# Altium PCB air-quality-monitoring-system_pcb.PcbDoc
Units mil, origin at the board's own origin, x right, y up, seen from the top; angles counter-clockwise.
Board outline 6000 x 4000 mil, 2 copper layers (Top Layer, Bottom Layer); 36 components, 30 nets, 143 pads, 19 vias.
Unrouted connection lines stored in the file: 89.
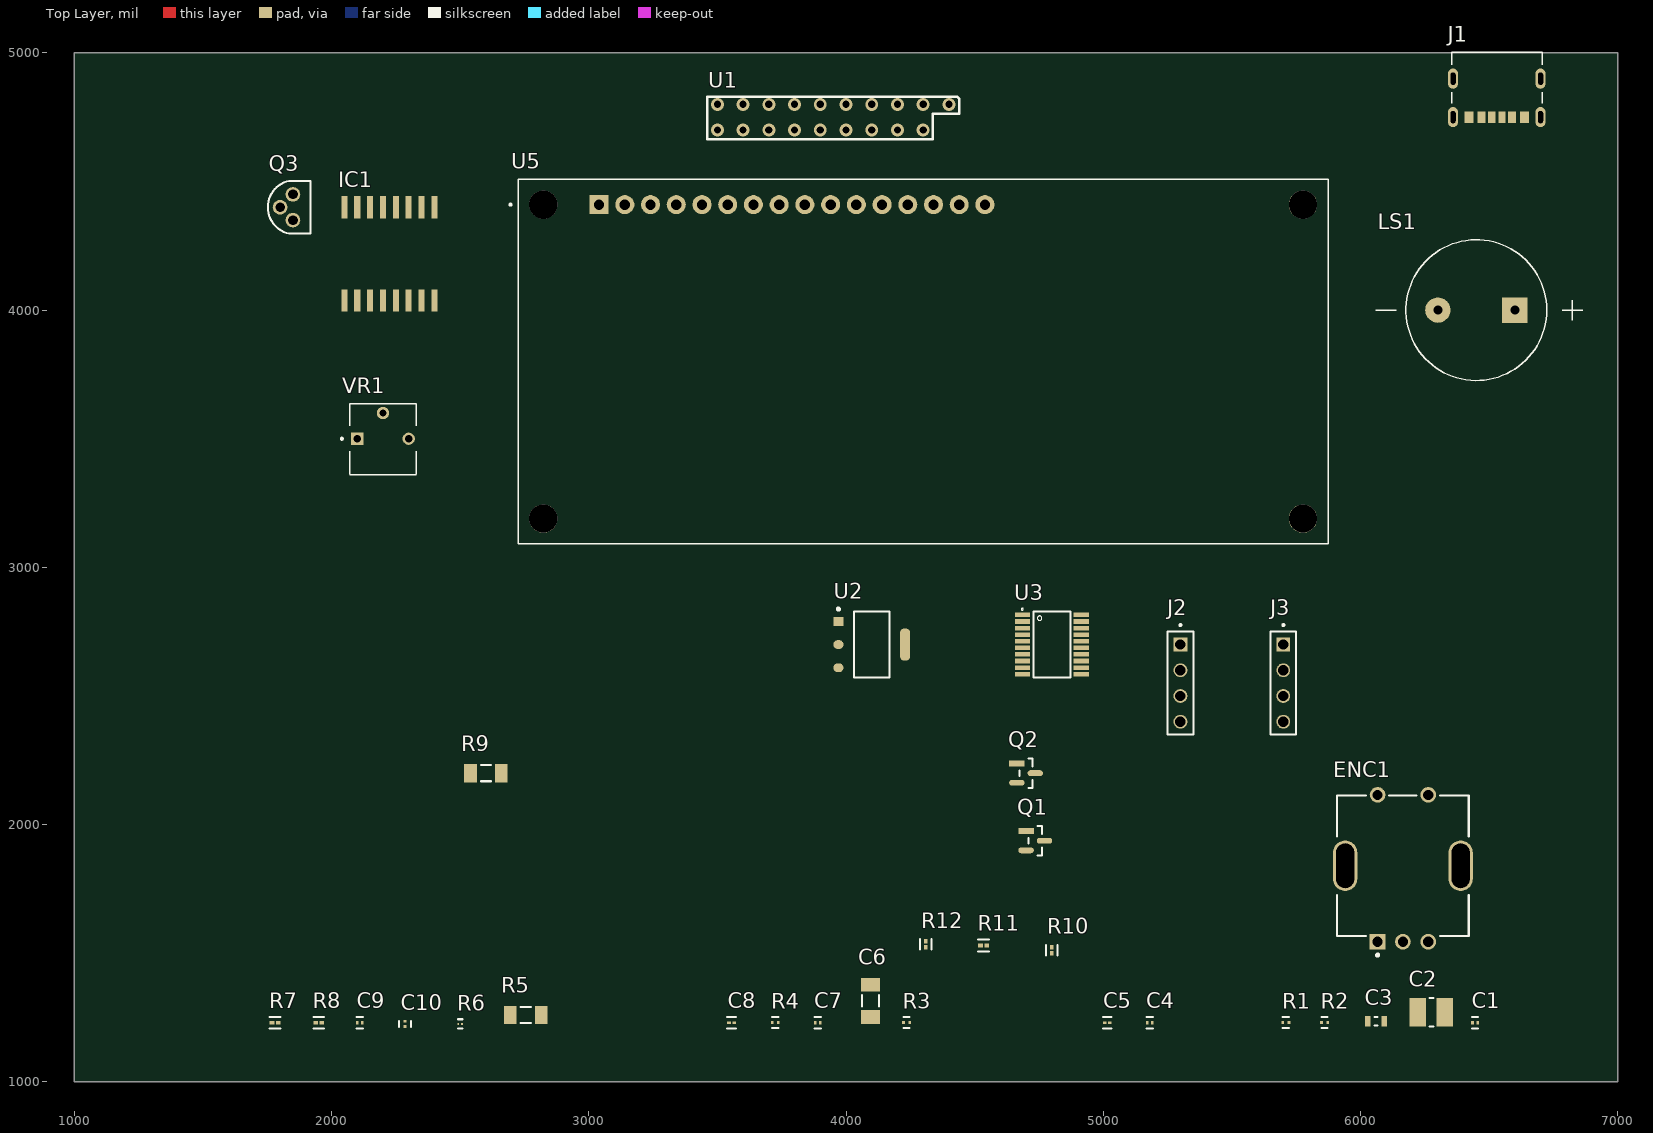
[diagram p0: Top Layer view]
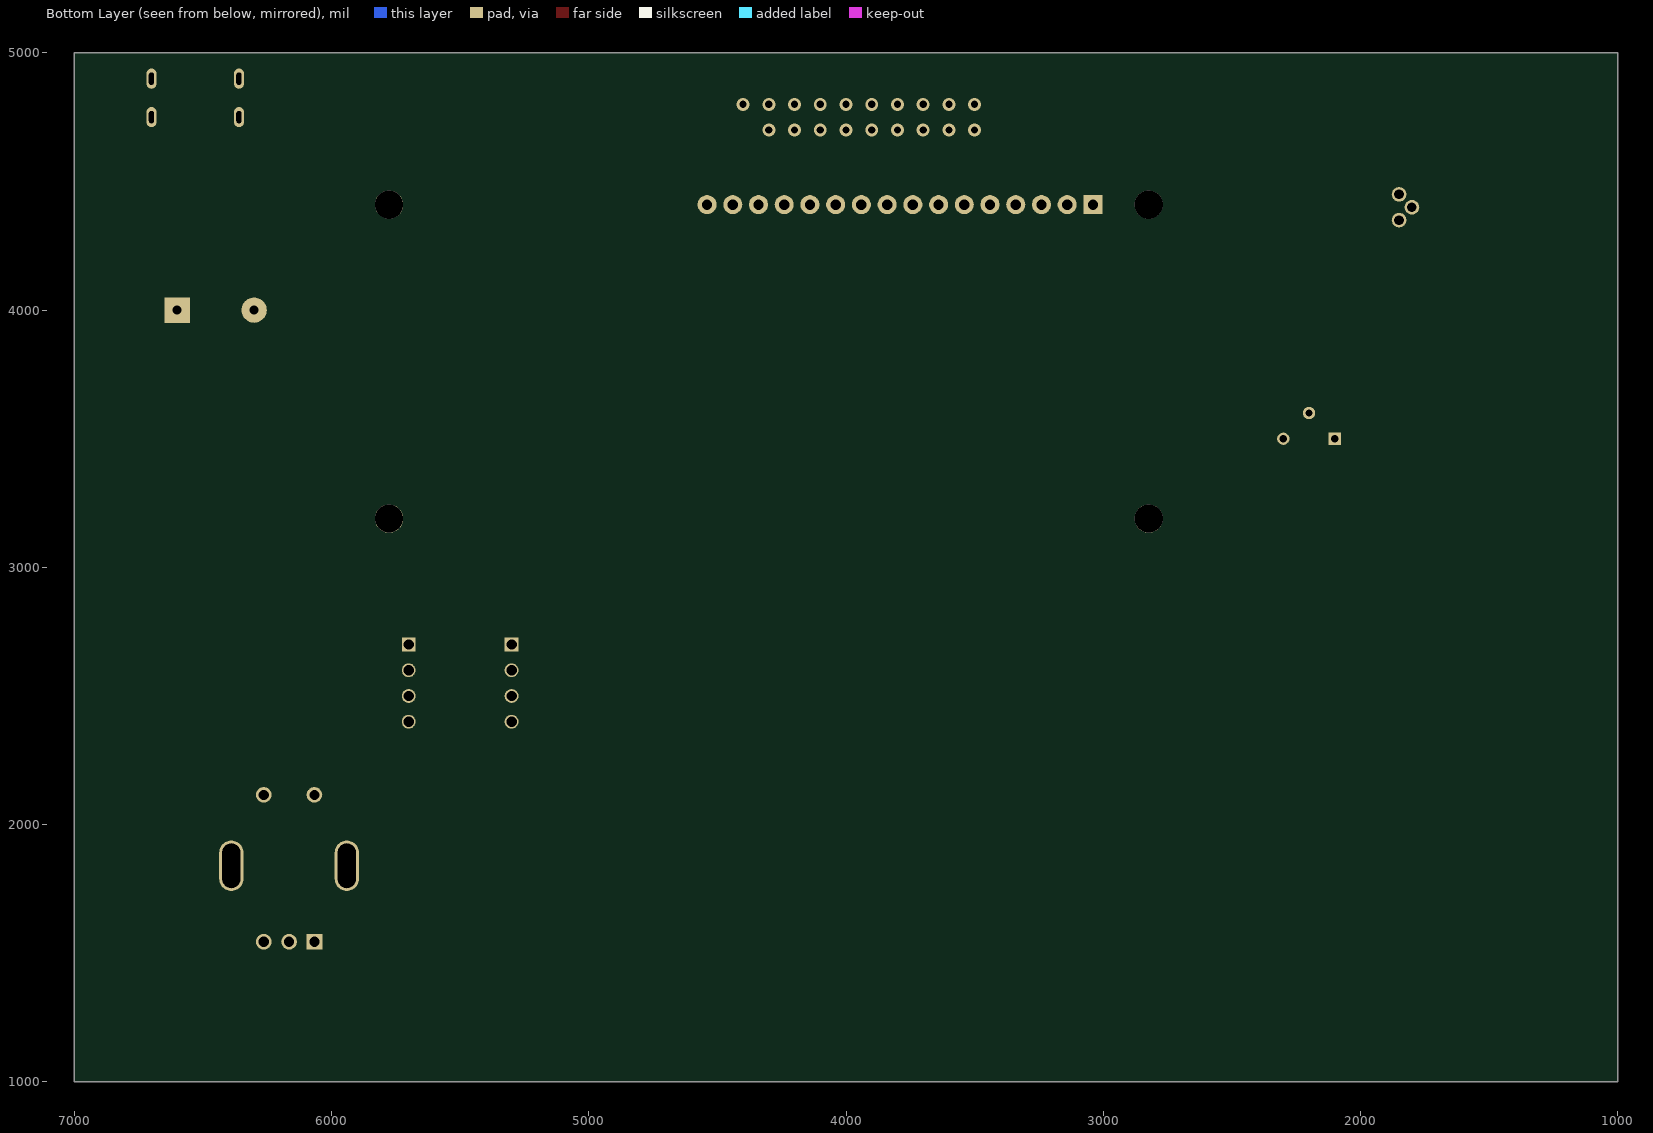
[diagram p1: Bottom Layer view, seen from below]

## Layer stack, top to bottom
Top Solder: solder mask 0.4, Solder Resist, Dk 3.5
Top Layer: signal copper 1.4
Dielectric 1: dielectric 12.6, FR-4, Dk 4.8
Bottom Layer: signal copper 1.4
Bottom Solder: solder mask 0.4, Solder Resist, Dk 3.5

## Board outline
1000,1000 7000,1000 7000,5000 1000,5000

## Design rules (kind name [scope] priority, off if disabled: settings)
Clearance [All] p1: gap=10 ignorepadtopadclearanceinfootprint=FALSE
PolygonConnect [All] p1: connectstyle=Relief reliefconductorwidth=10 reliefentries=4 polygonreliefangle="90 Angle" airgapwidth=10
RoutingVias [All] p1: holewidth=28 width=50 viastyle="Through Hole" minholewidth=28 minwidth=50 maxholewidth=28 maxwidth=50
SolderMaskExpansion [All] p1: expansion=4 istentingtop=FALSE
SupplyNets "Schematic Supply Nets_2" [InNet('GND')] p1: voltage=0.000
SupplyNets "Schematic Supply Nets_1" [InNet('+3.3V')] p2: voltage=0.000
SupplyNets "Schematic Supply Nets" [InNet('+5V')] p3: voltage=0.000
Width [All] p1: maxlimit=10 minlimit=10 preferedwidth=10
30 further rules are at their usual default settings.

## Components (designator, comment, footprint, x,y, rotation, side; value= is the part's Value field where it differs from the comment)
C1 "1uF" FP-0201-L_0_6_0_03-W_0_3-MFG 6445.31,1230 r0 top
C2 "22uF" FP-CL32-IPC_B 6275.31,1270 r0 top
C3 "10uF" CAPC1609X100X15NL20 6060.31,1235 r0 top
C4 "100nF" FP-0201-L_0_6_0_03-W_0_3-MFG 5180.31,1230 r0 top
C5 "10nF" FP-CL03-IPC_C 5015.31,1230 r0 top
C6 "1uF" CAPC1206(3216)150_M 4095.32,1315 r90 top
C7 "100nF" FP-0201-L_0_6_0_03-W_0_3-MFG 3890.32,1230 r0 top
C8 "10nF" FP-CL03-IPC_C 3555.32,1230 r0 top
C9 "1uF" FP-0201-L_0_6_0_03-W_0_3-MFG 2110.32,1230 r0 top
C10 "1uF" FP-0201-L_0_6_0_03-W_0_3-MFG 2285.32,1225 r90 top
ENC1 "PEC11R-4115F-S0018" FP-PEC11R-4115F-S0018-MFG 6165,1840 r0 top
IC1 "PCF8574" SO16W 2225,4218.9 r0 top
J1 "USB Type-C" CUI_UJC-HP-3-SMT-TR 6529.92,4750.39 r180 top
J2 "UART" SAMTEC_MTSW-104-07-G-S-200 5300,2550 r90 top
J3 "ST-Link V2" SAMTEC_MTSW-104-07-G-S-200 5700,2550 r90 top
LS1 "CPI-148-24-90T-67" XDCR_CPI-148-24-90T-67 6450.39,4000 r180 top
Q1 "BSS138" FP-318-08-IPC_B 4735.83,1937.4 r0 top
Q2 "BSS138" FP-318-08-IPC_B 4700,2200 r0 top
Q3 "SS8050DBU" FP-135AN-MFG 1835.04,4400 r0 top
R1 "10k" FP-ERJ1R-MFG 5710.31,1230 r0 top
R2 "10k" FP-ERJ1R-MFG 5860.31,1230 r0 top
R3 "10k" FP-ERJ1R-MFG 4235.31,1230 r0 top
R4 "10k" FP-ERJ1R-MFG 3725.32,1230 r0 top
R5 "1k" RESC3116X65X40ML10T20 2755.32,1260 r0 top
R6 "220" Samsung_RC0402_MFG 2500.32,1225 r0 top
R7 "4.7k" FP-MCR004-IPC_A 1780.32,1230 r0 top
R8 "4.7k" FP-MCR004-IPC_A 1950.32,1230 r0 top
R9 "1k" RESC3116X65X40ML10T20 2600,2200 r0 top
R10 "4.7k" FP-MCR004-IPC_A 4800,1511.92 r90 top
R11 "4.7k" FP-MCR004-IPC_A 4535,1530 r0 top
R12 "4.7k" FP-MCR004-IPC_A 4310,1535 r90 top
U1 "MH-Z14A" MH-Z14A 4200,4700 r180 top
U2 "AMS1117-3.3" FP-AMS1117-IPC_C 4100,2700 r0 top
U3 "STM8S103F3P6" SOP65P640X120-20N 4800,2700 r0 top
U5 "LCD-16X2" MODULE_LCD-16X2 4300,3800 r0 top
VR1 "3362P-1-102" TRIM_3362P-1-102 2200,3500 r0 top

## Footprints (in the part's own frame and the unit in brackets; to place one, negate y for a bottom-side part, rotate by r counter-clockwise, add the part's x,y. Pads: shape width x height; smd on the part's side, far side on the other; paste and mask are expansions set on the pad)
CAPC1206(3216)150_M [mm] "Chip Capacitor, Body 3.2x1.6mm, Height 1.5mm, IPC Low Density"
  rect 1.35x1.9 smd: 1(-1.6,0) 2(1.6,0)
  silkscreen extent -0.55,-0.85 0.55,0.85, body extent -1.7,-0.9 1.7,0.9, height 1.5
CAPC1609X100X15NL20 [mm] "Chip Capacitor, 2-Leads, Body 1.60x0.85mm, IPC Medium Density"
  rect 0.55x1.05 smd: 1(-0.825,0) 2(0.825,0)
  silkscreen extent -0.15,-0.43 0.15,0.43, body extent -0.9,-0.53 0.9,0.53, height 1
CUI_UJC-HP-3-SMT-TR [mm]
  rect 0.7x1.15 smd: A5(-0.5,0.005) B5(0.5,0.005)
  rect 0.8x1.15 smd: A9(1.52,0.005) B9(-1.52,0.005)
  rect 0.9x1.15 smd: A12(2.75,0.005) B12(-2.75,0.005)
  oval 1x2 hole 0.5 slot 1.2 at 90 deg: S1(-4.32,0) S2(4.32,0) S3(-4.32,-3.8) S4(4.32,-3.8)
  silkscreen extent -4.47,-6.4 4.47,-1.35, body extent -4.47,-4.28 4.47,2.62, height 1.93
FP-135AN-MFG [mm]
  round 1.45 hole 0.95 paste-2539.97 mask+0: 1(0.38,-1.27) 2(-0.89,0) 3(0.38,1.27)
  silkscreen extent -2.1,-2.6 2.09,2.6, body extent -2.19,-2.7 2.19,2.7, height 0.25
FP-0201-L_0_6_0_03-W_0_3-MFG [mm]
  rect 0.25x0.325 smd paste+0 mask+0: 1(-0.25,0) 2(0.25,0)
  silkscreen extent -0.32,-0.58 0.32,0.58, body extent -0.48,-0.27 0.48,0.27, height 0.25
FP-318-08-IPC_B [mm]
  rect 1.524x0.578 smd paste+0 mask+0: 1(-0.91,0.95)
  rrect100% 1.524x0.578 smd paste+0 mask+0: 2(-0.91,-0.95) 3(0.91,0)
  silkscreen extent -0.65,-1.45 0.65,1.45, body extent -1.92,-1.7 1.92,1.7, height 0.25
FP-AMS1117-IPC_C [mm]
  rect 1.004x0.872 smd paste+0 mask+0: 1(-3.295,2.29)
  rrect100% 1.004x0.872 smd paste+0 mask+0: 2(-3.295,0) 3(-3.295,-2.29)
  rrect87% 1.004x3.182 smd paste+0 mask+0: 4(3.295,0)
  silkscreen extent -3.42,-3.25 1.75,3.62, body extent -3.9,-3.35 3.9,3.35, height 0.25
FP-CL03-IPC_C [mil]
  rect 13.94x10.34 smd paste+0 mask+0: 1(-10.01,0) 2(10.01,0)
  silkscreen extent -17,-22 17,22, body extent -21,-10 21,10, height 10
FP-CL32-IPC_B [mil]
  rect 65.06x110.4 smd paste+0 mask+0: 1(-52.17,0) 2(52.18,0)
  silkscreen extent -8,-55 8,55, body extent -95,-65 95,65, height 10
FP-ERJ1R-MFG [mm]
  rect 0.25x0.3 smd paste+0 mask+0: 1(-0.3,0) 2(0.3,0)
  silkscreen extent -0.32,-0.54 0.32,0.54, body extent -0.53,-0.27 0.53,0.27, height 0.25
FP-MCR004-IPC_A [mil]
  rect 17.94x14.22 smd paste+0 mask+0: 1(-11.92,0) 2(11.92,0)
  silkscreen extent -21,-23 21,23, body extent -29,-15 29,15, height 10
FP-PEC11R-4115F-S0018-MFG [mm]
  round 1.55 hole 1 paste-2539.97 mask+0: 1(-2.5,7) 2(2.5,7) B(2.5,-7.5) C(0,-7.5)
  rrect100% 2.4x5 hole 4.4 slot 1.8 at 0 deg paste-2539.97 mask+0: 3(-5.7,0) 4(5.7,0)
  rect 1.55x1.55 hole 1 paste-2539.97 mask+0: A(-2.5,-7.5)
  silkscreen extent -6.5,-8.95 6.5,6.95, body extent -7,-8.37 7,7.88, height 0.25
MH-Z14A [mil]
  silkscreen extent -240,-130 740,35
MODULE_LCD-16X2 [mm]
  rect 1.88x1.88 / inner round 1.88 / far side rect 1.88x1.88 hole 1.016: 1(-32,15.5)
  round 1.88 hole 1.016: 2(-29.46,15.5) 3(-26.92,15.5) 4(-24.38,15.5) 5(-21.84,15.5) 6(-19.3,15.5) 7(-16.76,15.5) 8(-14.22,15.5) 9(-11.68,15.5) 10(-9.14,15.5) 11(-6.6,15.5) 12(-4.06,15.5) 13(-1.52,15.5) 14(1.02,15.5) 15(3.56,15.5) 16(6.1,15.5)
  round 2.8 hole 2.8 unplated: ""(-37.5,-15.5) ""(-37.5,15.5) ""(37.5,-15.5) ""(37.5,15.5)
  silkscreen extent -40.85,-18 40,18, body extent -40,-18 40,18, height 10.2
RESC3116X65X40ML10T20 [mm] "Chip Resistor, 2-Leads, Body 3.10x1.60mm, IPC Low Density"
  rect 1.25x1.8 smd: 1(-1.525,0) 2(1.525,0)
  silkscreen extent -0.5,-0.8 0.5,0.8, body extent -1.6,-0.85 1.6,0.85, height 0.65
Samsung_RC0402_MFG [mm]
  rect 0.17x0.18 smd paste+0 mask+0: 1(-0.185,0) 2(0.185,0)
  silkscreen extent -0.21,-0.47 0.21,0.47, body extent -0.37,-0.21 0.37,0.21, height 0.25
SAMTEC_MTSW-104-07-G-S-200 [mm]
  rect 1.37x1.37 / inner round 1.37 / far side rect 1.37x1.37 hole 1.02: 01(3.81,0)
  round 1.37 hole 1.02: 02(1.27,0) 03(-1.27,0) 04(-3.81,0)
  silkscreen extent -5.08,-1.27 5.83,1.27
SO16W [mm]
  rect 0.6x2.2 smd: 1(-4.445,-4.6) 2(-3.175,-4.6) 3(-1.905,-4.6) 4(-0.635,-4.6) 5(0.635,-4.6) 6(1.905,-4.6) 7(3.175,-4.6) 8(4.445,-4.6) 9(4.445,4.6) 10(3.175,4.6) 11(1.905,4.6) 12(0.635,4.6) 13(-0.635,4.6) 14(-1.905,4.6) 15(-3.175,4.6) 16(-4.445,4.6)
  body extent -5.16,-5.15 5.16,5.15, height 2.65
SOP65P640X120-20N [mm]
  rect 1.5x0.45 smd: 1(-2.9,2.925) 2(-2.9,2.275) 3(-2.9,1.625) 4(-2.9,0.975) 5(-2.9,0.325) 6(-2.9,-0.325) 7(-2.9,-0.975) 8(-2.9,-1.625) 9(-2.9,-2.275) 10(-2.9,-2.925) 11(2.9,-2.925) 12(2.9,-2.275) 13(2.9,-1.625) 14(2.9,-0.975) 15(2.9,-0.325) 16(2.9,0.325) 17(2.9,0.975) 18(2.9,1.625) 19(2.9,2.275) 20(2.9,2.925)
  silkscreen extent -3,-3.25 1.83,3.6, body extent -3.2,-3.25 3.2,3.25, height 0.53
TRIM_3362P-1-102 [mil]
  rect 48.11x48.11 / inner round 48.11 / far side rect 48.11x48.11 hole 28.11: 1(-100,0)
  round 48.11 hole 28.11: 2(0,100) 3(100,0)
  silkscreen extent -164,-139 130,137, body extent -130,-138 130,138, height 192
XDCR_CPI-148-24-90T-67 [mm]
  round 2.5 hole 0.9: N(3.8,0)
  rect 2.5x2.5 / inner round 2.5 / far side rect 2.5x2.5 hole 0.9: P(-3.8,0)
  silkscreen extent -10.49,-6.95 9.92,6.95, body extent -6.95,-6.95 6.95,6.95, height 7.5

## Part data
C1 C9 C10: library part CMP-14477-003636-2, "None", Capacitance=100nF, Case Code (Imperial)=0201, Case Code (Metric)=0603, Dielectric=X5R, Max Operating Temperature=85°C, Min Operating Temperature=-55°C, Package Quantity=1, Tolerance=10%, Voltage Rating=6.3V, Case/Package=0201, Construction=Flat, Contact Plating=Tin, Depth=0.3mm, Halogen Free="Halogen Free", Height=0.3mm, Lead Free="Lead Free", Length=0.6mm, Mount="Surface Mount", Packaging="Tape and Reel", Radiation Hardening=No, RoHS Compliant=Yes, Series=M, Termination=SMD/SMT, Thickness=0.013inch, Voltage Rating (DC)=6.3V, Width=0.012inch
C2: library part CMP-13271-001877-1, "Cap Ceramic 22uF 6.3V X7R ±20% SMD 1210 +125°C Embossed T/R", Case Code (Imperial)=1210, Case Code (Metric)=3225, Dielectric=X7R, Max Operating Temperature=125°C, Min Operating Temperature=-55°C, Package Quantity=1, Tolerance=20%, Voltage Rating=6.3V, Capacitance=22uF, Case/Package=1210, Depth=2.5mm, Height=2.5mm, Lead Free="Lead Free", Length=3.2mm, Mount="Surface Mount", Packaging="Tape and Reel", Radiation Hardening=No, Thickness=0.106inch, Voltage Rating (DC)=6.3V, Width=0.098inch
C3: library part CMP-2006-00190-1, Manufacturer="AVX Interconnect / Elco", Part Number=TACL106M006RTA
C4 C7: library part CMP-14477-003636-2, "None", Case Code (Imperial)=0201, Case Code (Metric)=0603, Dielectric=X5R, Max Operating Temperature=85°C, Min Operating Temperature=-55°C, Package Quantity=1, Tolerance=10%, Voltage Rating=6.3V, Capacitance=100nF, Case/Package=0201, Construction=Flat, Contact Plating=Tin, Depth=0.3mm, Halogen Free="Halogen Free", Height=0.3mm, Lead Free="Lead Free", Length=0.6mm, Mount="Surface Mount", Packaging="Tape and Reel", Radiation Hardening=No, RoHS Compliant=Yes, Series=M, Termination=SMD/SMT, Thickness=0.013inch, Voltage Rating (DC)=6.3V, Width=0.012inch
C5 C8: library part CMP-2010-00307-2, "Cap Ceramic 10nF 6.3V X7R ±10% Pad SMD 0201 +125°C T/R", Case Code (Imperial)=0201, Case Code (Metric)=0603, Dielectric=X7R, Max Operating Temperature=125°C, Min Operating Temperature=-55°C, Package Quantity=1, Tolerance=10%, Voltage Rating=6.3V, Capacitance=10nF, Case/Package=0201, Depth=0.3mm, Height=0.3mm, Length=0.6mm, Mount="Surface Mount", Packaging="Tape and Reel", Radiation Hardening=No, Thickness=0.013inch, Width=0.012inch
C6: library part CMP-1037-04668-1, "CAP 1uF 6.3V ±10% 1206 (3216 Metric) Thickness 1.45mm SMD", Case-EIA=1206, Case-Metric=3216, Rated Voltage="6.3 V", Tolerance=Â±10%, Max Thickness="1.45 mm", Technology=SMT
ENC1: library part CMP-07421-000064-1, "ROTARY ENCODER MECHANICAL 18PPR", Max Operating Temperature=70°C, Min Operating Temperature=-30°C, Package Quantity=150, Built in Switch=Yes, Detent=Yes, Encoder Type=Mechanical, Height=13.4mm, Hole Diameter=1.8mm, Length=21.5mm, Mount="Through Hole", Number of Channels=2, Number of Pins=5, Orientation=Vertical, Output Type=Quadrature, Packaging=Bulk, Pulses per Revolution=18, Radiation Hardening=No, REACH SVHC="No SVHC", RoHS Compliant=Yes, Series=PEC11R, Termination="PC Pins", Width=12.5mm
IC1: "I/O Expander 8 IÂ²C 100 kHz 20-VQFN (3.5x4.5)", Package="VFQFN-16 Texas Instruments", Check_prices=https://www.snapeda.com/parts/PCF8574/Texas+Instruments/view-part/?ref=eda, MF="Texas Instruments", MP=PCF8574, SnapEDA_Link=https://www.snapeda.com/parts/PCF8574/Texas+Instruments/view-part/?ref=snap
J1: library part UJC-HP-3-SMT-TR, Package=None, Availability=Unavailable, MP=UJC-HP-3-SMT-TR, Price=None
J2 J3: library part MTSW-104-07-G-S-200, Package=None, Availability=Unavailable, MP=MTSW-104-07-G-S-200, Price=None
LS1: "13,9 Ð¼Ð¼, 24 Ð’ Ð¿Ð¾ÑÑ‚. Ñ‚Ð¾ÐºÐ°, 90 Ð´Ð‘, ÑÐºÐ²Ð¾Ð·Ð½Ð¾Ðµ Ð¾Ñ‚Ð²ÐµÑ€ÑÑ‚Ð¸Ðµ, Ð¿ÑŒÐµÐ·Ð¾ÑÐ»ÐµÐºÑ‚Ñ€Ð¸Ñ‡ÐµÑÐºÐ¸Ð¹ Ð·Ð²ÑƒÐºÐ¾Ð²Ð¾Ð¹ Ð¸Ð½Ð´Ð¸ÐºÐ°Ñ‚Ð¾Ñ€", Package=None, Check_prices=https://www.snapeda.com/parts/CPI-148-24-90T-67/Same+Sky/view-part/?ref=eda, MF="Same Sky", MP=CPI-148-24-90T-67, SnapEDA_Link=https://www.snapeda.com/parts/CPI-148-24-90T-67/Same+Sky/view-part/?ref=snap
Q1 Q2: library part CMP-07173-000101-1, "MOSFET N-CH 50V 220MA SOT-23", Case/Package=SOT-23, Continuous Drain Current (ID)=220mA, Drain to Source Breakdown Voltage=50V, Drain to Source Resistance=3.5R, Gate to Source Voltage (Vgs)=20V, Input Capacitance=27pF, Max Operating Temperature=150°C, Max Power Dissipation=360mW, Min Operating Temperature=-55°C, On-State Resistance=6R, Package Quantity=1, Threshold Voltage=1.3V, Contact Plating=Tin, Current Rating=220mA, Drain to Source Voltage (Vdss)=50V, Dual Supply Voltage=50V, Element Configuration=Single, Fall Time=9ns, Height=0.93mm, Lead Free="Lead Free", Length=2.92mm, Mount="Surface Mount", Nominal Vgs=1.3V, Number of Elements=1, Number of Pins=3, Packaging="Tape and Reel", Power Dissipation=360mW, Radiation Hardening=No, Rds On Max=3.5R, REACH SVHC="No SVHC", Rise Time=9ns, Termination=SMD/SMT, Turn-Off Delay Time=20ns, Turn-On Delay Time=2.5ns, Voltage Rating (DC)=50V, Weight=0.03g, Width=1.3mm
Q3: library part CMP-00278-84331634-1, "SS8050DBU Bipolar (BJT) Single Transistor, NPN, 25 V, 100 MHz, 1 W, 1.5 A, 160", Case/Package=TO-92, Collector Base Voltage (VCBO)=40V, Collector Emitter Breakdown Voltage=25V, Collector Emitter Saturation Voltage=500mV, Current Rating=1.5A, Emitter Base Voltage (VEBO)=6V, Frequency=100MHz, Manufacturer Lifecycle Status=ACTIVE, Max Junction Temperature (Tj)=150°C, Max Power Dissipation=1W, Min Operating Temperature=-65°C, Output Power=2W, Collector Emitter Voltage (VCEO)=25V, Element Configuration=Single, Gain Bandwidth Product=100MHz, Height=4.58mm, hFE Min=85, Lead Free="Lead Free", Length=4.58mm, Lifecycle Status=Production, Max Collector Current=1.5A, Max Frequency=100MHz, Max Operating Temperature=150°C, Mount="Through Hole", NexarPartId=84331634, Number of Elements=1, Number of Pins=3, Packaging=Bulk, Polarity=NPN, Power Dissipation=1W, Radiation Hardening=No, REACH SVHC="No SVHC", RoHS=Compliant, Schedule B="8541290080, 8541290080", Transition Frequency=100MHz, Voltage Rating (DC)=25V, Weight=179mg, Width=3.86mm
R1 R2 R3 R4: library part CMP-2004-03441-2, "RES SMD 10K OHM 0.5% 1/20W 0201", Case Code (Imperial)=0201, Case Code (Metric)=0603, Max Operating Temperature=125°C, Max Power Dissipation=50mW, Min Operating Temperature=-55°C, Package Quantity=15000, Resistance=10kR, Resistor Type="Thick Film", Temperature Coefficient=50ppm/°C, Tolerance=0.5%, Voltage Rating=15V, Case/Package=0201, Depth=0.3mm, Height=0.23mm, Lead Free="Lead Free", Length=0.6mm, Military Standard=Not, Mount="Surface Mount", Number of Terminations=2, Packaging="Tape and Reel", Power Rating=50mW, Series=ERJ, Termination=SMD/SMT, Width=0.3mm
R5 R9: library part CMP-2100-03678-1, "Chip Resistor, 1 KOhm, +/- 1%, 0.25 W, -55 to 155 degC, 1206 (3216 Metric), RoHS, Tape and Reel", Case Code (Imperial)=1206, Case Code (Metric)=3216, Manufacturer=Yageo, Max Operating Temperature=155degC, Min Operating Temperature=-55degC, Package Description="2-Pin Surface Mount Device, Body 3.1 x 1.6 mm", Package Reference=1206.0, Power Rating=250mW, Resistance=1KOhm, Temperature Coefficient=100ppm/degreesC, Tolerance=1%, Voltage Rating=200V, Case/Package=1206, Composition=ThickFilm, Datasheet URL=http://www.yageo.com/NewPortal/yageodocoutput?fileName=/pdf/R-Chip/PYu-RC_Group_51_RoHS_L_5.pdf, Datasheet Version="Rev. 5, 10/2016", Depth=1.6mm, Height=0.55mm, Lead Free=LeadFree, Length=3.1mm, Manufacturer URL=http://www.yageo.com/, Military Standard=Not, Packaging=TapeandReel, REACH SVHC=Unknown, RoHSCompliant=true, Termination=SMD/SMT
R6: library part CMP-01479-28965025-1, "RC0402J221CS 220Ω, ±5 %, Chip Resistor, 1/32W(0.031W), 01005/0402 (inch/mm), RoHS", Case Code (Imperial)=1005, Case Code (Metric)=0402, Max Operating Temperature=125°C, Max Power Dissipation=30mW, Min Operating Temperature=-55°C, Resistance=220Ω, Temperature Coefficient=250ppm/°C, Tolerance=5%, Voltage Rating=15V, Composition="Thick Film", Features="Moisture Resistant", Height=150µm, Lead Free="Lead Free", Length=406.4µm, Lifecycle Status=Production, NexarPartId=28965025, Number of Terminations=2, Packaging="Tape & Reel (TR)", Power Rating=30mW, RoHS=Compliant, Thickness=130µm, Voltage Rating (DC)=15V, Width=203.2µm
R7 R8 R10 R11 R12: library part CMP-08839-023667-1, "Thick Film Chip Resistor, 01005, 4.7kΩ, 1%, 250ppm/°C, 0.031W, 15V", Case Code (Imperial)=1005, Case Code (Metric)=0402, Max Operating Temperature=125°C, Max Power Dissipation=30mW, Min Operating Temperature=-55°C, Package Quantity=15000, Resistance=4.7kR, Resistor Type="Thick Film", Temperature Coefficient=250ppm/°C, Tolerance=1%, Voltage Rating (DC)=15V, Height=0.006inch, Length=0.016inch, Number of Terminations=2, Packaging="Tape and Reel", RoHS Compliant=Yes, Series=MCR004, Width=0.008inch
U2: library part CMP-209535-000001-1, "LDO Voltage Regulators 1A, 3.3V", Dropout Voltage=1.1V, Manufacturer="Advanced Monolithic Systems", Max Junction Temp=+125°C, Max Power Dissipation=1.2W, Max Supply Voltage=15V, Nominal Supply Current=5mA, Output Current=1A, Output Voltage=3.3V, Package=AMS1117, Temperature="-40°C to +125°C", Temperature Range Low=-40°C, Automotive=No, Category=IC, ComponentLink2Description=Datasheet, ComponentLink2URL=http://www.advanced-monolithic.com/pdf/ds1117.pdf, Device Class L1="Integrated Circuits (ICs)", Device Class L2="Power Management ICs", Device Class L3="Voltage Regulators - Linear", Height=1.8mm, Ipc Land Pattern Name=SOT229P700X180-4, Lead Free=Yes, Manufacturer Part Number=AMS1117-3.3, Number Of Outputs=1, Octopart=https://octopart.com/ams1117-3.3-advanced+monolithic+systems-25899300, Output Type=Fixed, RoHS=TRUE, Standoff Height=0.64mm, Temperature Range High=+125°C
U3: "STM8 series Microcontroller IC 8-Bit 16MHz 8KB (8K x 8) FLASH 20-TSSOP", Package="TSSOP-20 STMicroelectronics", Check_prices=https://www.snapeda.com/parts/STM8S103F3P6/STMicroelectronics/view-part/?ref=eda, MF=STMicroelectronics, MP=STM8S103F3P6, SnapEDA_Link=https://www.snapeda.com/parts/STM8S103F3P6/STMicroelectronics/view-part/?ref=snap
U5: "Display Development Tools 16x2 Black on Green Char LCD w Backlight", Package=None, Check_prices=https://www.snapeda.com/parts/LCD-16X2/Gravitech/view-part/?ref=eda, MF=Gravitech, MP=LCD-16X2, SnapEDA_Link=https://www.snapeda.com/parts/LCD-16X2/Gravitech/view-part/?ref=snap
VR1: "TRIMMER - 1/4in SQ ST CERMET", Package="3362P-1 Bourns Inc.", Check_prices=https://www.snapeda.com/parts/3362P-1-102/Bourns/view-part/?ref=eda, MF=Bourns, MP=3362P-1-102, SnapEDA_Link=https://www.snapeda.com/parts/3362P-1-102/Bourns/view-part/?ref=snap

## Via types
v1: diameter 50, hole 28, Top Layer to Bottom Layer, 19 vias

## Nets (pads, with @x,y where several pads share a name; then routed paths per layer and width w, separated by ;. In a path a pad name is that pad's centre, name@x,y a point inside that pad or via, vN(x,y) a via of type N, cw(c..) or ccw(c..) an arc to the next point about the centre after c; other vN are vias at no path point)
+3.3V: C2.1 C4.1 C10.1 J2.01 J3.01 Q1.1 Q2.1 R1.2 R2.2 R5.2 R7.2 R9.2 R10.1 U2.2 U2.4 U3.9
+5V: C1.1 C3.2 C9.1 IC1.16 J1.A9 R8.1 R11.1 R12.2 U2.3 U5.2 VR1.3
GND: C1.2 C2.2 C3.1 C4.2 C5.1 C6.1 C7.2 C8.2 C9.2 C10.2 ENC1.2 ENC1.C IC1.8 J1.A12 J1.B12 J1.S1 J1.S2 J1.S3 J1.S4 J2.04 J3.03 LS1.N Q3.1 U2.1 U3.7 U5.1 VR1.1
NetC5_2: C5.2 R3.1 U3.5
NetC6_2: C6.2 U3.8
NetC7_1: C7.1 ENC1.1 U3.13
NetC8_1: C8.1 R4.1 U3.6
NetENC1_A: ENC1.A R2.1 R3.2
NetENC1_B: ENC1.B R1.1 R4.2
NetIC1_4: IC1.4 U5.4
NetIC1_5: IC1.5 U5.5
NetIC1_6: IC1.6 U5.6
NetIC1_7: IC1.7 Q3.2 R12.1
NetIC1_9: IC1.9 U5.11
NetIC1_10: IC1.10 U5.12
NetIC1_11: IC1.11 U5.13
NetIC1_12: IC1.12 U5.14
NetIC1_14: IC1.14 Q2.3 R11.2
NetIC1_15: IC1.15 Q1.3 R8.2
NetJ2_02: J2.02 U3.2
NetJ2_03: J2.03 U3.3
NetJ3_02: J3.02 U3.18
NetJ3_04: J3.04 U3.4
NetLS1_P: LS1.P R6.2
NetQ1_2: Q1.2 R7.1 R9.1 U3.11
NetQ2_2: Q2.2 R5.1 R10.2 U3.12
NetQ3_3: Q3.3 U5.16
NetR6_1: R6.1 U3.14
NetU1_6: U3.10
NetU5_3: U5.3 VR1.2
pads on no net: ENC1.3 ENC1.4 IC1.1 IC1.2 IC1.3 IC1.13 J1.A5 J1.B5 J1.B9 U3.1 U3.15 U3.16 U3.17 U3.19 U3.20 U5. U5.7 U5.8 U5.9 U5.10 U5.15
copper on no net:
  other v1: 3500,4700 3600,4700 3700,4700 3800,4700 3900,4700 4000,4700 4100,4700 4200,4700 4300,4700 3500,4800 3600,4800 3700,4800 3800,4800 3900,4800 4000,4800 4100,4800 4200,4800 4300,4800 4400,4800